# EAGLE board v1.job (EAGLE 6.4)
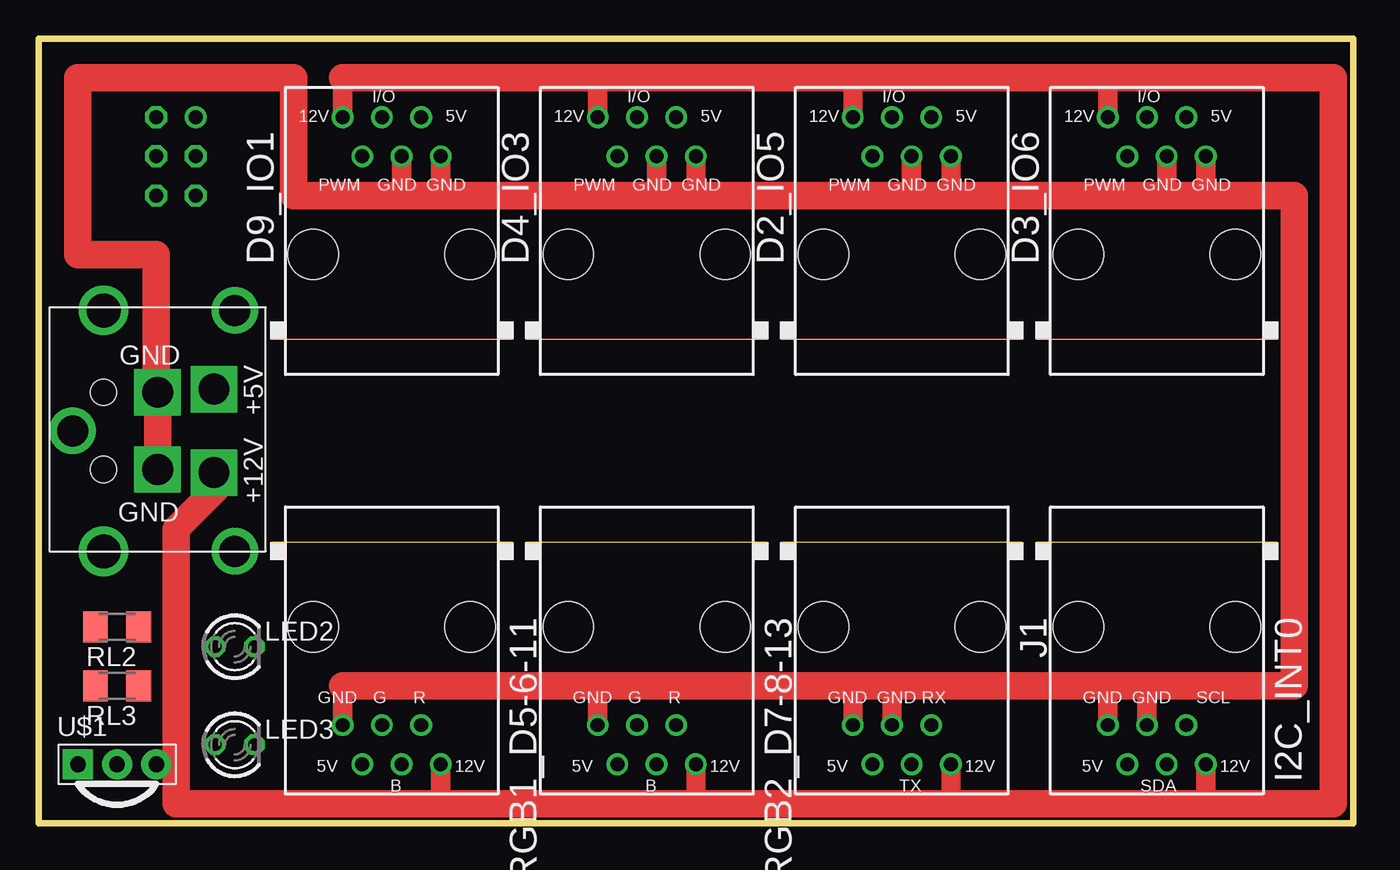
[diagram p0: board, top side]
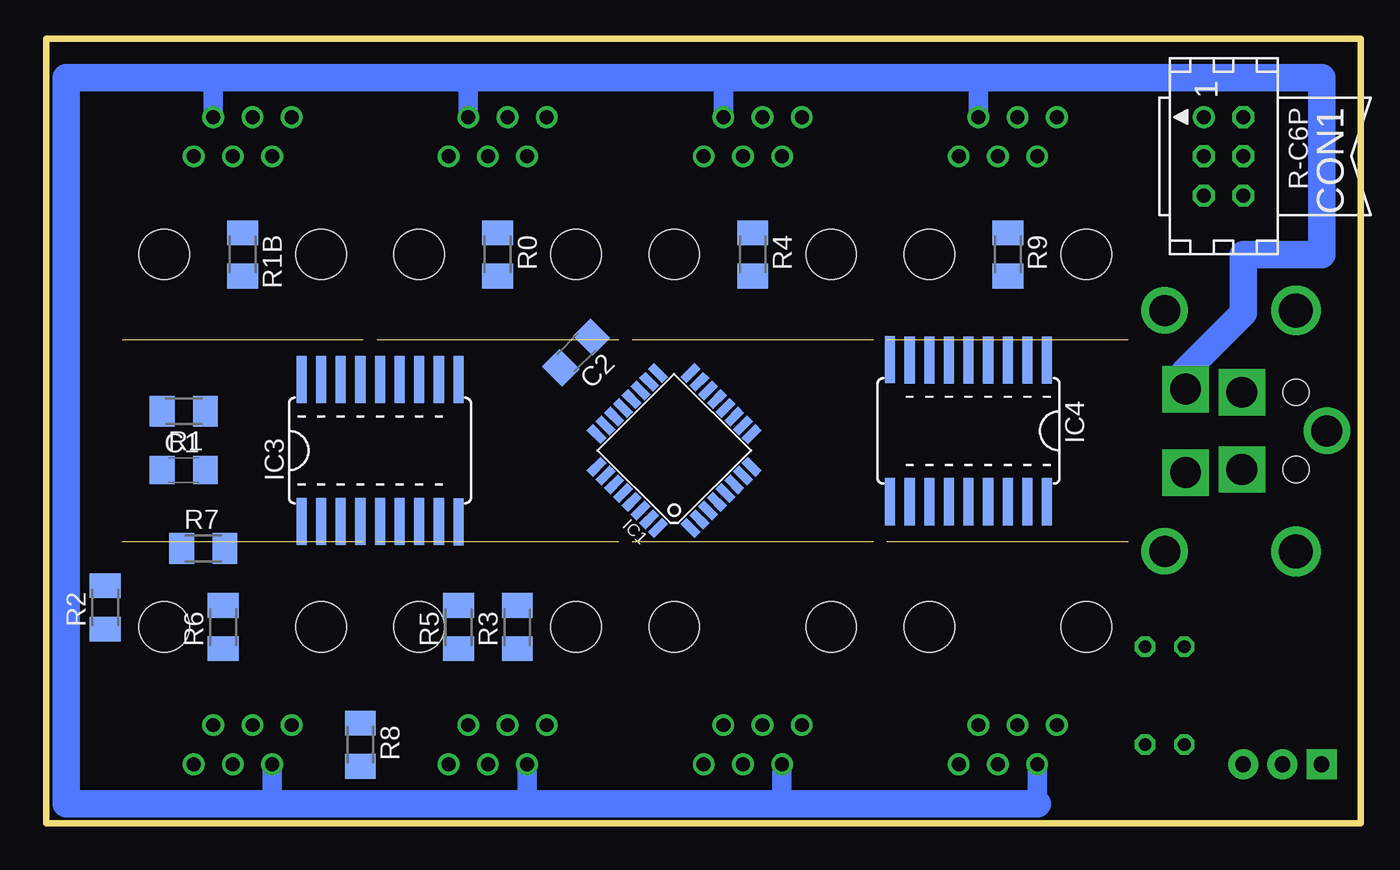
[diagram p1: board, bottom side, seen from below]

Size 85.09 x 50.8 mm. Coordinates in mm from the lower left corner, seen from the top.
Outline: 0,0 0,50.8 85.09,50.8 85.09,0 0,0
Copper layers (1*16): Top 0.035mm / dielectric 1.5mm / Bottom 0.035mm
Design rules "default": minimum track width 10mil, minimum drill 24mil, track to track 8mil, track to pad 8mil, pad to pad 8mil, via to via 8mil, smd to smd 8mil, copper to edge 40mil, drill to drill 8mil, minimum pad ring 10mil, minimum via ring 8mil, stop-mask expansion 4mil, vias tented up to drill 0mil, thermal gap 10mil
Net classes: 0 default: width 0.152 mm; 1 power: width 0.457 mm; 2 highpower: width 0.457 mm
vRestrict: area 88.9,22.9 to 101.6,35.6

## Footprints (pad centres in the part's own frame; a part is rotated, then mirrored left to right if it is on the bottom)
C1206 = smd 1.6 x 1.8: 1 -1.4,0; 2 1.4,0
TINYISP = drill 0.914 octagon: GND 2.54,1.27; MOSI 0,1.27; RESET 2.54,-1.27; SCK 0,-1.27; VCC -2.54,1.27 | drill 0.914: MISO -2.54,-1.27
RJ12-STRAIGHT = drill 0.9 pad 1.4: +5V 1.905,8.89; +12V -3.175,8.89; GND1 3.175,6.35; GND2 0.635,6.35; I/O -0.635,8.89; PWM -1.905,6.35 | hole 3.251: -5.08,0; 5.08,0
RJ12-STRAIGHT-I2C = drill 0.9 pad 1.4: +5V 1.905,8.89; +12V -3.175,8.89; GND1 3.175,6.35; GND2 0.635,6.35; SCL -1.905,6.35; SDA -0.635,8.89 | hole 3.251: -5.08,0; 5.08,0
TQFP32-08 = smd 1.27 x 0.559: 1 -4.293,2.8; 2 -4.293,2; 3 -4.293,1.2; 4 -4.293,0.4; 5 -4.293,-0.4; 6 -4.293,-1.2; 7 -4.293,-2; 8 -4.293,-2.8; 17 4.293,-2.8; 18 4.293,-2; 19 4.293,-1.2; 20 4.293,-0.4; 21 4.293,0.4; 22 4.293,1.2; 23 4.293,2; 24 4.293,2.8 | smd 0.559 x 1.27: 9 -2.8,-4.293; 10 -2,-4.293; 11 -1.2,-4.293; 12 -0.4,-4.293; 13 0.4,-4.293; 14 1.2,-4.293; 15 2,-4.293; 16 2.8,-4.293; 25 2.8,4.293; 26 2,4.293; 27 1.2,4.293; 28 0.4,4.293; 29 -0.4,4.293; 30 -1.2,4.293; 31 -2,4.293; 32 -2.8,4.293
SO18W = smd 0.66 x 3.048: 1 -5.08,-4.585; 2 -3.81,-4.585; 3 -2.54,-4.585; 4 -1.27,-4.585; 5 0,-4.585; 6 1.27,-4.585; 7 2.54,-4.585; 8 3.81,-4.585; 9 5.08,-4.623; 10 5.08,4.585; 11 3.81,4.585; 12 2.54,4.585; 13 1.27,4.585; 14 0,4.585; 15 -1.27,4.585; 16 -2.54,4.585; 17 -3.81,4.585; 18 -5.08,4.585
RJ12-STRAIGHT-RS232 = drill 0.9 pad 1.4: +5V 1.905,8.89; +12V -3.175,8.89; GND1 3.175,6.35; GND2 0.635,6.35; RX -1.905,6.35; TX -0.635,8.89 | hole 3.251: -5.08,0; 5.08,0
LED3MM = drill 0.813 octagon: A -1.27,0; K 1.27,0
M1206 = smd 1.6 x 2: 1 -1.4,0; 2 1.4,0
RJ12-STRAIGHT-RGB = drill 0.9 pad 1.4: +5V 1.905,8.89; +12V -3.175,8.89; B -0.635,8.89; G 0.635,6.35; GND1 3.175,6.35; R -1.905,6.35 | hole 3.251: -5.08,0; 5.08,0
PNA460XM = drill 1.016 pad 1.93 square: 1 -2.54,0 | drill 1.016 pad 1.93: 2 0,0; 3 2.54,0
KPJX-4S-S = drill 2 square: +5V 2.7,1.35; +12V -2.7,1.35; GND1 -2.5,5; GND2 2.5,5 | drill 2: P$1 -7.8,0; P$2 7.8,0; P$11 0,10.5 | drill 2.2: P$3 -7.8,8.5; P$4 7.8,8.5 | hole 1.7: -2.5,8.5; 2.5,8.5

## Placement (x,y rotation side)
C1  0.1uF  [C1206]  76.2,22.86 0 bottom
C2  0.1uF  [C1206]  50.8,30.48 225 bottom
CON1  [TINYISP]  8.89,43.18 270 bottom
D2_IO5  IO5  [RJ12-STRAIGHT]  55.88,36.83 0 top
D3_IO6  IO6  [RJ12-STRAIGHT]  72.39,36.83 0 top
D4_IO3  IO3  [RJ12-STRAIGHT]  39.37,36.83 0 top
D9_IO1  IO1  [RJ12-STRAIGHT]  22.86,36.83 0 top
I2C_INT0  I2C  [RJ12-STRAIGHT-I2C]  72.39,12.7 180 top
IC1  MEGA8-AI  [TQFP32-08]  44.45,24.13 135 bottom
IC3  ULN2803A  [SO18W]  63.5,24.13 0 bottom
IC4  ULN2803A  [SO18W]  25.4,25.4 180 bottom
J1  RJ12STRAIGHT-RS232-SERVER  [RJ12-STRAIGHT-RS232]  55.88,12.7 180 top
LED2  [LED3MM]  12.7,11.43 0 top
LED3  [LED3MM]  12.7,5.08 0 top
R0  1K  [M1206]  55.88,36.83 270 bottom
R1  10k  [M1206]  76.2,26.67 180 bottom
R1B  1K  [M1206]  72.39,36.83 270 bottom
R2  1K  [M1206]  81.28,13.97 90 bottom
R3  1K  [M1206]  54.61,12.7 90 bottom
R4  1K  [M1206]  39.37,36.83 270 bottom
R5  1K  [M1206]  58.42,12.7 90 bottom
R6  1K  [M1206]  73.66,12.7 90 bottom
R7  10K  [M1206]  74.93,17.78 0 bottom
R8  10K  [M1206]  64.77,5.08 270 bottom
R9  1K  [M1206]  22.86,36.83 270 bottom
RGB1_D5-6-11  RGB1  [RJ12-STRAIGHT-RGB]  22.86,12.7 180 top
RGB2_D7-8-13  RGB2  [RJ12-STRAIGHT-RGB]  39.37,12.7 180 top
RL2  1K  [M1206]  5.08,12.7 180 top
RL3  1K  [M1206]  5.08,8.89 180 top
U$1  PNA460XM  [PNA460XM]  5.08,3.81 0 top
U$2  KPJX-4S-S  [KPJX-4S-S]  12.7,25.4 90 top

## Library data of the parts
C1 C2 R0 R1 R1B R2-R9 RL2 RL3 = resistor
CON1 = lpatiny; OC_FARNELL: unknown; OC_NEWARK: unknown
D2_IO5 D3_IO6 D4_IO3 D9_IO1 I2C_INT0 IC3 IC4 J1 LED2 LED3 RGB1_D5-6-11 RGB2_D7-8-13 U$2 = lpatiny
IC1 = atmel; MPN: ATMEGA8-16AU; OC_FARNELL: 9171371; OC_NEWARK: 73M8863
U$1 = adafruit

## Nets
+5V [power]: C1.1 C2.1 CON1.VCC D2_IO5.+5V D3_IO6.+5V D4_IO3.+5V D9_IO1.+5V I2C_INT0.+5V IC1.4 IC1.6 IC1.18 J1.+5V R1.2 R7.2 R8.2 RGB1_D5-6-11.+5V RGB2_D7-8-13.+5V RL2.2 U$2.+5V
+12V [highpower]: D2_IO5.+12V D3_IO6.+12V D4_IO3.+12V D9_IO1.+12V I2C_INT0.+12V J1.+12V RGB1_D5-6-11.+12V RGB2_D7-8-13.+12V RL3.2 U$2.+12V
A0: IC1.23 R0.2
A1: IC1.24 R1B.2
A2: IC1.25 R4.2
A3: IC1.26 R9.2
A6: IC1.19
A7: IC1.22
COM: IC3.10 IC4.10
D2: IC1.32 IC3.5
D2B: D4_IO3.I/O R4.1
D2B1: D9_IO1.I/O R9.1
D2B4: I2C_INT0.SDA R2.1
D2B5: J1.TX R3.1
D2B6: D2_IO5.I/O R0.1
D2B7: D3_IO6.I/O R1B.1
D3: IC1.1 IC4.1 IC4.2
D4: IC1.2
D5: IC1.9 IC4.5 IC4.6
D6: IC1.10 IC4.3 IC4.4
D7: IC1.11 IC4.7 IC4.8
D8: IC1.12 IC3.1 IC3.2
D9: IC1.13 IC3.7
D10: IC1.14 IC3.8
D13: IC3.3 IC3.4
GND [power]: C2.2 CON1.GND D2_IO5.GND1 D2_IO5.GND2 D3_IO6.GND1 D3_IO6.GND2 D4_IO3.GND1 D4_IO3.GND2 D9_IO1.GND1 D9_IO1.GND2 I2C_INT0.GND1 I2C_INT0.GND2 IC1.3 IC1.5 IC1.21 IC3.9 IC4.9 J1.GND1 J1.GND2 LED2.K LED3.K RGB1_D5-6-11.GND1 RGB2_D7-8-13.GND1 U$1.2 U$2.GND1 U$2.GND2
MISO: CON1.MISO IC1.16
MOSI: CON1.MOSI IC1.15
N$1: IC3.6
N$2: D3_IO6.PWM IC3.13
N$4: C1.2 IC1.20
N$22 [power]: D4_IO3.PWM IC3.12
N$26: IC1.7
N$27: IC1.8
N$48 [power]: IC3.17 IC3.18 RGB2_D7-8-13.B
N$49 [power]: IC4.17 IC4.18 RGB1_D5-6-11.R
N$50 [power]: IC4.15 IC4.16 RGB1_D5-6-11.B
N$51 [power]: D9_IO1.PWM IC3.11
N$57 [power]: IC3.15 IC3.16 RGB2_D7-8-13.G
N$60 [power]: D2_IO5.PWM IC3.14
N$68 [power]: IC4.13 IC4.14 RGB1_D5-6-11.G
N$69 [power]: IC4.11 IC4.12 RGB2_D7-8-13.R
N$70: J1.RX R5.1
N$71: I2C_INT0.SCL R6.1
N$75: LED3.A RL3.1
N$76: LED2.A RL2.1
RESET: CON1.RESET IC1.29 R1.1
RX: IC1.30 R5.2
SCK: CON1.SCK IC1.17
SCL: IC1.28 R6.2 R7.1
SDA: IC1.27 R2.2 R8.1
TX: IC1.31 R3.2
VCC: U$1.3

## Tracks (layer width: path | path; a pad name or v marks a point on that pad's centre or on a via)
+5V
  Bottom 1.27: 20.95,1.27 RGB1_D5-6-11.+5V | RGB2_D7-8-13.+5V 37.47,1.27 | J1.+5V 53.98,1.27 | I2C_INT0.+5V 70.48,1.27 | D3_IO6.+5V 74.3,48.26 | D2_IO5.+5V 57.78,48.26 | D4_IO3.+5V 41.27,48.26 | D9_IO1.+5V 24.77,48.26
  Bottom 1.778: U$2.+5V 11.35,29.29 7.62,33.02 7.62,36.83 2.54,36.83 2.54,48.26 24.77,48.26 41.27,48.26 57.78,48.26 74.3,48.26 83.82,48.26 83.82,1.27 70.48,1.27 53.98,1.27 37.47,1.27 20.95,1.27
+12V
  Top 1.27: 19.68,48.26 D9_IO1.+12V | D4_IO3.+12V 36.2,48.26 | RGB1_D5-6-11.+12V 26.04,1.27 | RGB2_D7-8-13.+12V 42.55,1.27 | J1.+12V 59.05,1.27 | I2C_INT0.+12V 75.56,1.27 | D3_IO6.+12V 69.22,48.26 | D2_IO5.+12V 52.7,48.26
  Top 1.778: U$2.+12V 11.35,21.51 8.89,19.05 8.89,1.27 26.04,1.27 42.55,1.27 59.05,1.27 75.56,1.27 83.82,1.27 83.82,48.26 69.22,48.26 52.7,48.26 36.2,48.26 19.68,48.26
GND
  Top 1.27: U$2.GND2 7.62,27.9 | 19.68,8.89 RGB1_D5-6-11.GND1 | RGB2_D7-8-13.GND1 36.2,8.89 | J1.GND1 52.7,8.89 | I2C_INT0.GND1 69.22,8.89 | J1.GND2 55.24,8.89 | I2C_INT0.GND2 71.75,8.89 | D3_IO6.GND2 73.03,40.64 | D3_IO6.GND1 75.56,40.64 | D2_IO5.GND1 59.05,40.64 | D2_IO5.GND2 56.52,40.64 | D4_IO3.GND1 42.55,40.64 | D4_IO3.GND2 40.01,40.64 | D9_IO1.GND1 26.04,40.64 | D9_IO1.GND2 23.5,40.64
  Top 1.778: U$2.GND1 U$2.GND2 | 7.62,27.9 7.62,36.83 2.54,36.83 2.54,48.26 16.51,48.26 16.51,40.64 23.5,40.64 26.04,40.64 40.01,40.64 42.55,40.64 56.52,40.64 59.05,40.64 73.03,40.64 75.56,40.64 81.28,40.64 81.28,8.89 71.75,8.89 69.22,8.89 55.24,8.89 52.7,8.89 36.2,8.89 19.68,8.89